# EAGLE board CT_schematic (EAGLE 7.6.0)

Size 100 x 80 mm. Coordinates in mm from the lower left corner, seen from the top.
Outline: 0,0 100,0 100,80 0,80 0,0
Copper layers (1*16): Top 0.035mm / dielectric 1.5mm / Bottom 0.035mm
Design rules "default": minimum track width 10mil, minimum drill 24mil, track to track 8mil, track to pad 8mil, pad to pad 8mil, via to via 8mil, smd to smd 8mil, copper to edge 40mil, drill to drill 8mil, minimum pad ring 10mil, minimum via ring 8mil, stop-mask expansion 4mil, vias tented up to drill 0mil, thermal gap 10mil

## Footprints (pad centres in the part's own frame; a part is rotated, then mirrored left to right if it is on the bottom)
C0603 = smd 0.8 x 0.8: 1 -0.762,0; 2 0.762,0
C0402 = smd 0.5 x 0.5: 1 -0.508,0; 2 0.508,0
C0805 = smd 1.2 x 1.3: 1 -1.016,0; 2 1.016,0
C1206 = smd 1.3 x 1.6: 1 -1.524,0; 2 1.524,0
C1210 = smd 1.2 x 2.5: 1 -1.524,0; 2 1.524,0
2220 = smd 1.85 x 5.5: 1 -2.55,0; 2 2.55,0
R0603 = smd 0.8 x 0.8: 1 -0.762,0; 2 0.762,0
EXV-9H = smd 3.505 x 1.676: 1 -2.857,0; 2 2.857,0
L0603 = smd 0.8 x 0.8: 1 -0.762,0; 2 0.762,0
WE-HCI_7030/7040/7050 = smd 2.5 x 3: 1 -2.45,0; 2 2.45,0
L1210 = smd 1.2 x 2.5: 1 -1.524,0; 2 1.524,0
PJ-037B_PACKAGE = drill 3.7 square: 1 12,0 | drill 3.2 square: 2 6,0
UFBGA176 = smd 0.3 x 0.3: A1 0,0; A2 0.65,0; A3 1.3,0; A4 1.95,0; A5 2.6,0; A6 3.25,0; A7 3.9,0; A8 4.55,0; A9 5.2,0; A10 5.85,0; A11 6.5,0; A12 7.15,0; A13 7.8,0; A14 8.45,0; A15 9.1,0; B1 0,-0.65; B2 0.65,-0.65; B3 1.3,-0.65; B4 1.95,-0.65; B5 2.6,-0.65; B6 3.25,-0.65; B7 3.9,-0.65; B8 4.55,-0.65; B9 5.2,-0.65; B10 5.85,-0.65; B11 6.5,-0.65; B12 7.15,-0.65; B13 7.8,-0.65; B14 8.45,-0.65; B15 9.1,-0.65; C1 0,-1.3; C2 0.65,-1.3; C3 1.3,-1.3; C4 1.95,-1.3; C5 2.6,-1.3; C6 3.25,-1.3; C7 3.9,-1.3; C8 4.55,-1.3; C9 5.2,-1.3; C10 5.85,-1.3; C11 6.5,-1.3; C12 7.15,-1.3; C13 7.8,-1.3; C14 8.45,-1.3; C15 9.1,-1.3; D1 0,-1.95; D2 0.65,-1.95; D3 1.3,-1.95; D4 1.95,-1.95; D5 2.6,-1.95; D6 3.25,-1.95; D7 3.9,-1.95; D8 4.55,-1.95; D9 5.2,-1.95; D10 5.85,-1.95; D11 6.5,-1.95; D12 7.15,-1.95; D13 7.8,-1.95; D14 8.45,-1.95; D15 9.1,-1.95; E1 0,-2.6; E2 0.65,-2.6; E3 1.3,-2.6; E4 1.95,-2.6; E12 7.15,-2.6; E13 7.8,-2.6; E14 8.45,-2.6; E15 9.1,-2.6; F1 0,-3.25; F2 0.65,-3.25; F3 1.3,-3.25; F4 1.95,-3.25; F6 3.25,-3.25; F7 3.9,-3.25; F8 4.55,-3.25; F9 5.2,-3.25; F10 5.85,-3.25; F12 7.15,-3.25; F13 7.8,-3.25; F14 8.45,-3.25; F15 9.1,-3.25; G1 0,-3.9; G2 0.65,-3.9; G3 1.3,-3.9; G4 1.95,-3.9; G6 3.25,-3.9; G7 3.9,-3.9; G8 4.55,-3.9; G9 5.2,-3.9; G10 5.85,-3.9; G12 7.15,-3.9; G13 7.8,-3.9; G14 8.45,-3.9; G15 9.1,-3.9; H1 0,-4.55; H2 0.65,-4.55; H3 1.3,-4.55; H4 1.95,-4.55; H6 3.25,-4.55; H7 3.9,-4.55; H8 4.55,-4.55; H9 5.2,-4.55; H10 5.85,-4.55; H12 7.15,-4.55; H13 7.8,-4.55; H14 8.45,-4.55; H15 9.1,-4.55; J1 0,-5.2; J2 0.65,-5.2; J3 1.3,-5.2; J4 1.95,-5.2; J6 3.25,-5.2; J7 3.9,-5.2; J8 4.55,-5.2; J9 5.2,-5.2; J10 5.85,-5.2; J12 7.15,-5.2; J13 7.8,-5.2; J14 8.45,-5.2; J15 9.1,-5.2; K1 0,-5.85; K2 0.65,-5.85; K3 1.3,-5.85; K4 1.95,-5.85; K6 3.25,-5.85; K7 3.9,-5.85; K8 4.55,-5.85; K9 5.2,-5.85; K10 5.85,-5.85; K12 7.15,-5.85; K13 7.8,-5.85; K14 8.45,-5.85; K15 9.1,-5.85; L1 0,-6.5; L2 0.65,-6.5; L3 1.3,-6.5; L4 1.95,-6.5; L12 7.15,-6.5; L13 7.8,-6.5; L14 8.45,-6.5; L15 9.1,-6.5; M1 0,-7.15; M2 0.65,-7.15; M3 1.3,-7.15; M4 1.95,-7.15; M5 2.6,-7.15; M6 3.25,-7.15; M7 3.9,-7.15; M8 4.55,-7.15; M9 5.2,-7.15; M10 5.85,-7.15; M11 6.5,-7.15; M12 7.15,-7.15; M13 7.8,-7.15; M14 8.45,-7.15; M15 9.1,-7.15; N1 0,-7.8; N2 0.65,-7.8; N3 1.3,-7.8; N4 1.95,-7.8; N5 2.6,-7.8; N6 3.25,-7.8; N7 3.9,-7.8; N8 4.55,-7.8; N9 5.2,-7.8; N10 5.85,-7.8; N11 6.5,-7.8; N12 7.15,-7.8; N13 7.8,-7.8; N14 8.45,-7.8; N15 9.1,-7.8; P1 0,-8.45; P2 0.65,-8.45; P3 1.3,-8.45; P4 1.95,-8.45; P5 2.6,-8.45; P6 3.25,-8.45; P7 3.9,-8.45; P8 4.55,-8.45; P9 5.2,-8.45; P10 5.85,-8.45; P11 6.5,-8.45; P12 7.15,-8.45; P13 7.8,-8.45; P14 8.45,-8.45; P15 9.1,-8.45; R1 0,-9.1; R2 0.65,-9.1; R3 1.3,-9.1; R4 1.95,-9.1; R5 2.6,-9.1; R6 3.25,-9.1; R7 3.9,-9.1; R8 4.55,-9.1; R9 5.2,-9.1; R10 5.85,-9.1; R11 6.5,-9.1; R12 7.15,-9.1; R13 7.8,-9.1; R14 8.45,-9.1; R15 9.1,-9.1
10100565 = smd 0.8 x 2.35: 1 0,0; 2 1.25,0; 3 2.55,0; 4 4.25,0; 5 5.43,0; 6 6.68,0; 7 7.93,0; 8 9.18,0; 9 11.67,0; 10 14.18,0; 11 15.43,0; 12 16.68,0; 13 17.93,0; 14 19.18,0; 15 21.68,0 | smd 1.5 x 3.1: 16 23.495,-1.375; 20 25.685,-22.875 | smd 1.55 x 3.1: 17 -1.815,-1.375; 21 -1.815,-22.875 | drill 1.1 pad 1.1: 18 21.68,-2.375; 19 0.68,-2.375
SSOP-28 = smd 1.5 x 0.4: 1 -3.625,4.225; 2 -3.625,3.575; 3 -3.625,2.925; 4 -3.625,2.275; 5 -3.625,1.625; 6 -3.625,0.975; 7 -3.625,0.325; 8 -3.625,-0.325; 9 -3.625,-0.975; 10 -3.625,-1.625; 11 -3.625,-2.275; 12 -3.625,-2.925; 13 -3.625,-3.575; 14 -3.625,-4.225; 15 3.625,-4.225; 16 3.625,-3.575; 17 3.625,-2.925; 18 3.625,-2.275; 19 3.625,-1.625; 20 3.625,-0.975; 21 3.625,-0.325; 22 3.625,0.325; 23 3.625,0.975; 24 3.625,1.625; 25 3.625,2.275; 26 3.625,2.925; 27 3.625,3.575; 28 3.625,4.225
FCI_10118193-0001LF = smd 0.4 x 1.35: 1 -1.3,2.675; 2 -0.65,2.675; 3 0,2.675; 4 0.65,2.675; 5 1.3,2.675 | smd 1.6 x 1.4: 6 -3.2,2.45; 7 3.2,2.45 | smd 1.9 x 1.9: 8 -1.2,0; 9 1.2,0 | hole 0.5: -3.3,0; 3.3,0
TST-110-05-T-D-RA = drill 1 pad 1.7 square: 1 0,0 | drill 1 pad 1.7: 2 0,2.54; 3 2.54,0; 4 2.54,2.54; 5 5.08,0; 6 5.08,2.54; 7 7.62,0; 8 7.62,2.54; 9 10.16,0; 10 10.16,2.54; 11 12.7,0; 12 12.7,2.54; 13 15.24,0; 14 15.24,2.54; 15 17.78,0; 16 17.78,2.54; 17 20.32,0; 18 20.32,2.54; 19 22.86,0; 20 22.86,2.54
LH430WV2-SD01 = smd 0.23 x 0.7: 1 0,0; 2 -0.4,0; 3 -0.8,0; 4 -1.2,0; 5 -1.6,0; 6 -2,0; 7 -2.4,0; 8 -2.8,0; 9 -3.2,0; 10 -3.6,0; 11 -4,0; 12 -4.4,0; 13 -4.8,0; 14 -5.2,0; 15 -5.6,0; 16 -5.6,-2.15; 17 -5.2,-2.15; 18 -4.8,-2.15; 19 -4.4,-2.15; 20 -4,-2.15; 21 -3.6,-2.15; 22 -3.2,-2.15; 23 -2.8,-2.15; 24 -2.4,-2.15; 25 -2,-2.15; 26 -1.6,-2.15; 27 -1.2,-2.15; 28 -0.8,-2.15; 29 -0.4,-2.15; 30 0,-2.15
WFDN-8 = smd 0.48 x 0.7: 1 0,0; 2 1.27,0; 3 2.54,0; 4 3.81,0; 5 3.81,4.45; 6 2.54,4.45; 7 1.27,4.45; 8 0,4.45 | smd 4 x 3: 9 1.89,2.25
ABS07-32.768KHZ-7-T = smd 1.1 x 2.4: 1 -2.5,0; 2 0,0
ABLS-25.000MHZ-B2F-T = smd 5.6 x 2.8: 1 -3.81,0; 2 5.69,0
ABLS-12.000MHZ-B4-T = smd 5.6 x 2.8: 1 0,0; 2 9.5,0
WSON-8 = smd 0.3 x 0.6: 1 -0.75,0; 2 0.05,0; 3 0.85,0; 4 1.65,0; 5 1.65,3.8; 6 0.85,3.8; 7 0.05,3.8; 8 -0.75,3.8 | smd 3 x 2.6: PAD 0.45,1.9
SOIC-8_EP = smd 1.6 x 0.533: 1 -2.921,1.905; 2 -2.921,0.635; 3 -2.921,-0.635; 4 -2.921,-1.905; 5 2.921,-1.905; 6 2.921,-0.635; 7 2.921,0.635; 8 2.921,1.905 | smd 2.54 x 3.302: EPAD 0,0 | drill 0.406 pad 0.406: P$1 -0.508,0.635; P$2 0.381,0.635; P$3 -0.508,-0.635; P$4 0.381,-0.635
QFN-16_EP = smd 0.805 x 0.3: 1 -1.452,0.75; 2 -1.452,0.25; 3 -1.452,-0.25; 4 -1.452,-0.75; 9 1.452,-0.75; 10 1.452,-0.25; 11 1.452,0.25; 12 1.452,0.75 | smd 0.3 x 0.805: 5 -0.75,-1.452; 6 -0.25,-1.452; 7 0.25,-1.452; 8 0.75,-1.452; 13 0.75,1.452; 14 0.25,1.452; 15 -0.25,1.452; 16 -0.75,1.452 | smd 1.55 x 1.55: 17 0,0
DFN-8_DDB = smd 0.805 x 0.3: 1 -0.952,0.75; 2 -0.952,0.25; 3 -0.952,-0.25; 4 -0.952,-0.75; 5 0.952,-0.75; 6 0.952,-0.25; 7 0.952,0.25; 8 0.952,0.75 | smd 0.61 x 2.2: 9 0,0
QFN-38_UHF = smd 0.75 x 0.3: 1 -2.4,2.75; 2 -2.4,2.25; 3 -2.4,1.75; 4 -2.4,1.25; 6 -2.4,0.25; 7 -2.4,-0.25; 8 -2.4,-0.75; 9 -2.4,-1.25; 10 -2.4,-1.75; 11 -2.4,-2.25; 12 -2.4,-2.75; 20 2.4,-2.75; 21 2.4,-2.25; 22 2.4,-1.75; 23 2.4,-1.25; 24 2.4,-0.75; 25 2.4,-0.25; 26 2.4,0.25; 27 2.4,0.75; 28 2.4,1.25; 29 2.4,1.75; 30 2.4,2.25; 31 2.4,2.75 | smd 0.758 x 0.3: 5 -2.4,0.75 | smd 0.3 x 0.75: 13 -1.5,-3.4; 14 -1,-3.4; 15 -0.5,-3.4; 16 0,-3.4; 17 0.5,-3.4; 18 1,-3.4; 19 1.5,-3.4; 32 1.5,3.4; 33 1,3.4; 34 0.5,3.4; 35 0,3.4; 36 -0.5,3.4; 37 -1,3.4; 38 -1.5,3.4 | smd 3.2 x 5.2: 39 0,0
IRF8306MTRPBF = smd 0.9 x 1.85: 1 0,0; 2 0,-2.35; 6 6.4,0; 7 6.4,-2.35 | smd 0.75 x 0.75: 3 1.75,-1.175 | smd 1.45 x 0.87: 4 3.5,-0.565; 5 3.5,-1.785
SW_4-1437565-2 = smd 1.4 x 2.1: 1 -2.23,4.55; 2 -2.23,-4.55; 3 2.23,4.55; 4 2.23,-4.55
LGM67K-G1J2-24-Z = smd 0.8 x 1.4: A -2,0; C 0,0
NC7SZ125M5X = smd 1.3 x 0.7: 1 -1.3,0.95; 2 -1.3,0; 3 -1.3,-0.95; 4 1.3,-0.95; 5 1.3,0.95

## Placement (x,y rotation side)
C1  1e-06  [C0603]  -34.29,91.44 0 top  (outside the outline)
C2  1e-07  [C0603]  -38.1,91.44 0 top  (outside the outline)
C3  1e-07  [C0603]  -41.91,91.44 0 top  (outside the outline)
C4  1e-07  [C0603]  -45.72,91.44 0 top  (outside the outline)
C5  1e-07  [C0603]  -49.53,91.44 0 top  (outside the outline)
C6  1e-07  [C0603]  -53.34,91.44 0 top  (outside the outline)
C7  1e-07  [C0603]  -57.15,91.44 0 top  (outside the outline)
C8  1e-07  [C0603]  -60.96,91.44 0 top  (outside the outline)
C9  1e-07  [C0603]  -64.77,91.44 0 top  (outside the outline)
C10  1e-07  [C0603]  -68.58,91.44 0 top  (outside the outline)
C11  1e-07  [C0603]  -72.39,91.44 0 top  (outside the outline)
C12  1e-07  [C0603]  -76.2,91.44 0 top  (outside the outline)
C13  1e-07  [C0603]  -80.01,91.44 0 top  (outside the outline)
C14  1e-07  [C0603]  -83.82,91.44 0 top  (outside the outline)
C15  1e-07  [C0603]  -87.63,91.44 0 top  (outside the outline)
C16  1e-07  [C0603]  -91.44,91.44 0 top  (outside the outline)
C17  4.7e-06  [C0603]  -15.24,91.44 0 top  (outside the outline)
C18  1e-08  [C0603]  -15.24,96.52 0 top  (outside the outline)
C19  1e-06  [C0603]  -19.05,96.52 0 top  (outside the outline)
C20  1e-07  [C0603]  -22.86,96.52 0 top  (outside the outline)
C21  2.2e-06  [C0603]  -19.05,91.44 0 top  (outside the outline)
C22  1e-07  [C0603]  -26.67,96.52 0 top  (outside the outline)
C23  1e-07  [C0603]  -30.48,96.52 0 top  (outside the outline)
C24  1e-11  [C0402]  -21.59,101.6 0 top  (outside the outline)
C25  1e-11  [C0402]  -25.4,101.6 0 top  (outside the outline)
C26  1e-11  [C0402]  -29.21,101.6 0 top  (outside the outline)
C27  1e-11  [C0402]  -33.02,101.6 0 top  (outside the outline)
C28  1e-07  [C0402]  -36.83,101.6 0 top  (outside the outline)
C29  1e-05  [C0805]  -72.39,69.85 0 top  (outside the outline)
C30  1e-07  [C0402]  -40.64,101.6 0 top  (outside the outline)
C31  4.7e-06  [C0805]  -77.47,69.85 0 top  (outside the outline)
C32  1e-07  [C0402]  -44.45,101.6 0 top  (outside the outline)
C33  1e-07  [C0402]  -48.26,101.6 0 top  (outside the outline)
C34  1e-07  [C0402]  -52.07,101.6 0 top  (outside the outline)
C35  1e-07  [C0402]  -55.88,101.6 0 top  (outside the outline)
C36  1e-07  [C0402]  -59.69,101.6 0 top  (outside the outline)
C37  1e-07  [C0402]  -63.5,101.6 0 top  (outside the outline)
C38  1e-07  [C0402]  -67.31,101.6 0 top  (outside the outline)
C39  1e-07  [C0402]  -71.12,101.6 0 top  (outside the outline)
C40  1e-07  [C0402]  -74.93,101.6 0 top  (outside the outline)
C41  1e-07  [C0402]  -78.74,101.6 0 top  (outside the outline)
C42  1e-08  [C0402]  -82.55,101.6 0 top  (outside the outline)
C43  1e-05  [C1206]  -41.91,69.85 0 top  (outside the outline)
C44  1e-05  [C0805]  -82.55,69.85 0 top  (outside the outline)
C45  1e-05  [C1210]  -77.47,63.5 0 top  (outside the outline)
C46  1e-05  [C1210]  -83.82,63.5 0 top  (outside the outline)
C47  1e-05  [C1210]  -90.17,63.5 0 top  (outside the outline)
C48  1e-05  [C1210]  -16.51,69.85 0 top  (outside the outline)
C49  1e-08  [C0402]  -86.36,101.6 0 top  (outside the outline)
C50  1e-05  [C1206]  -48.26,69.85 0 top  (outside the outline)
C51  1e-05  [C1210]  -22.86,69.85 0 top  (outside the outline)
C52  1e-05  [C0805]  -87.63,69.85 0 top  (outside the outline)
C53  1e-06  [C0603]  -34.29,96.52 0 top  (outside the outline)
C54  1e-07  [C0402]  -90.17,101.6 0 top  (outside the outline)
C55  6.8e-05  [2220]  -16.51,46.99 0 top  (outside the outline)
C56  1e-05  [C1210]  -29.21,69.85 0 top  (outside the outline)
C57  2.2e-06  [C0603]  -22.86,91.44 0 top  (outside the outline)
C58  2.2e-07  [C0603]  -26.67,91.44 0 top  (outside the outline)
C59  1e-07  [C0402]  -93.98,101.6 0 top  (outside the outline)
C60  2.2e-06  [C0603]  -30.48,91.44 0 top  (outside the outline)
C61  2.45e-08  [R0603]  -45.72,81.28 0 top  (outside the outline)
C62  2.8258362168397e-09  [R0603]  -20.32,76.2 0 top  (outside the outline)
C63  7.105e-09  [R0603]  -30.48,76.2 0 top  (outside the outline)
C64  0.0001  [EXV-9H]  -54.61,55.88 0 top  (outside the outline)
C65  0.0001  [EXV-9H]  -66.04,55.88 0 top  (outside the outline)
C66  1e-08  [C0402]  -15.24,106.68 0 top  (outside the outline)
C67  1e-08  [C0402]  -19.05,106.68 0 top  (outside the outline)
C68  1e-08  [C0402]  -22.86,106.68 0 top  (outside the outline)
F1  240.0  [L0603]  -38.1,96.52 0 top  (outside the outline)
I1  3.3e-06  [WE-HCI_7030/7040/7050]  -77.47,6.35 0 top  (outside the outline)
I2  1e-05  [L1210]  -35.56,69.85 0 top  (outside the outline)
J1  PJ-037B  [PJ-037B_PACKAGE]  -72.39,7.62 0 top  (outside the outline)
R2  1000.0  [R0603]  -41.91,96.52 0 top  (outside the outline)
R7  4700.0  [R0603]  -45.72,96.52 0 top  (outside the outline)
R8  4700.0  [R0603]  -49.53,96.52 0 top  (outside the outline)
R9  2200.0  [R0603]  -53.34,96.52 0 top  (outside the outline)
R10  10000.0  [R0603]  -50.8,81.28 0 top  (outside the outline)
R11  10000.0  [R0603]  -55.88,81.28 0 top  (outside the outline)
R12  10000.0  [R0603]  -60.96,81.28 0 top  (outside the outline)
R13  10000.0  [R0603]  -66.04,81.28 0 top  (outside the outline)
R14  100000.0  [R0603]  -35.56,76.2 0 top  (outside the outline)
R15  100000.0  [R0603]  -40.64,76.2 0 top  (outside the outline)
R16  100000.0  [R0603]  -45.72,76.2 0 top  (outside the outline)
R17  100000.0  [R0603]  -50.8,76.2 0 top  (outside the outline)
R18  100000.0  [R0603]  -55.88,76.2 0 top  (outside the outline)
R19  100000.0  [R0603]  -60.96,76.2 0 top  (outside the outline)
R20  100000.0  [R0603]  -66.04,76.2 0 top  (outside the outline)
R21  100000.0  [R0603]  -71.12,76.2 0 top  (outside the outline)
R22  100000.0  [R0603]  -76.2,76.2 0 top  (outside the outline)
R23  100000.0  [R0603]  -81.28,76.2 0 top  (outside the outline)
R24  100000.0  [R0603]  -86.36,76.2 0 top  (outside the outline)
R25  4700.0  [R0603]  -57.15,96.52 0 top  (outside the outline)
R26  10000.0  [R0603]  -71.12,81.28 0 top  (outside the outline)
R27  10000.0  [R0603]  -76.2,81.28 0 top  (outside the outline)
R28  10000.0  [R0603]  -81.28,81.28 0 top  (outside the outline)
R29  10000.0  [R0603]  -86.36,81.28 0 top  (outside the outline)
R30  10000.0  [R0603]  -91.44,81.28 0 top  (outside the outline)
R31  10000.0  [R0603]  -15.24,86.36 0 top  (outside the outline)
R32  10000.0  [R0603]  -20.32,86.36 0 top  (outside the outline)
R33  10000.0  [R0603]  -25.4,86.36 0 top  (outside the outline)
R34  10000.0  [R0603]  -30.48,86.36 0 top  (outside the outline)
R35  100000.0  [R0603]  -91.44,76.2 0 top  (outside the outline)
R36  100000.0  [R0603]  -15.24,81.28 0 top  (outside the outline)
R37  100000.0  [R0603]  -20.32,81.28 0 top  (outside the outline)
R38  100000.0  [R0603]  -25.4,81.28 0 top  (outside the outline)
R39  200.0  [R0603]  -60.96,96.52 0 top  (outside the outline)
R40  1000.0  [R0603]  -64.77,96.52 0 top  (outside the outline)
R41  910.0  [R0603]  -68.58,96.52 0 top  (outside the outline)
R42  2200.0  [R0603]  -72.39,96.52 0 top  (outside the outline)
R43  100000.0  [R0603]  -30.48,81.28 0 top  (outside the outline)
R44  1800.0  [R0603]  -76.2,96.52 0 top  (outside the outline)
R45  1000.0  [R0603]  -80.01,96.52 0 top  (outside the outline)
R46  20000.0  [R0603]  -35.56,86.36 0 top  (outside the outline)
R47  91000.0  [R0603]  -40.64,86.36 0 top  (outside the outline)
R48  300000.0  [R0603]  -35.56,81.28 0 top  (outside the outline)
R49  100000.0  [R0603]  -40.64,81.28 0 top  (outside the outline)
R50  1600000.0  [R0603]  -25.4,76.2 0 top  (outside the outline)
R51  10000.0  [R0603]  -45.72,86.36 0 top  (outside the outline)
R52  75000.0  [R0603]  -50.8,86.36 0 top  (outside the outline)
R53  10000.0  [R0603]  -55.88,86.36 0 top  (outside the outline)
R54  10000.0  [R0603]  -60.96,86.36 0 top  (outside the outline)
R55  95300.0  [R0603]  -66.04,86.36 0 top  (outside the outline)
R56  95300.0  [R0603]  -71.12,86.36 0 top  (outside the outline)
R57  10000.0  [R0603]  -76.2,86.36 0 top  (outside the outline)
R58  10000.0  [R0603]  -81.28,86.36 0 top  (outside the outline)
R59  10000.0  [R0603]  -86.36,86.36 0 top  (outside the outline)
R60  47000.0  [R0603]  -91.44,86.36 0 top  (outside the outline)
U1  STM32F469IEH6  [UFBGA176]  -41.91,39.37 0 top  (outside the outline)
U2  10100565  [10100565]  -40.64,25.4 0 top  (outside the outline)
U3  FT232RL-REEL  [SSOP-28]  -52.07,7.62 0 top  (outside the outline)
U4  10118193-0001LF  [FCI_10118193-0001LF]  -66.04,45.72 0 top  (outside the outline)
U5  TST-110-05-T-D-RA  [TST-110-05-T-D-RA]  -46.99,53.34 0 top  (outside the outline)
U6  LH430WV2-SD01  [LH430WV2-SD01]  -83.82,97.79 0 top  (outside the outline)
U7  SST26VF016B-104I/MF  [WFDN-8]  -62.23,33.02 0 top  (outside the outline)
U8  ABS07-32.768KHZ-7-T  [ABS07-32.768KHZ-7-T]  -48.26,63.5 0 top  (outside the outline)
U9  ABLS-25.000MHZ-B2F-T  [ABLS-25.000MHZ-B2F-T]  -85.09,55.88 0 top  (outside the outline)
U10  ABLS-12.000MHZ-B4-T  [ABLS-12.000MHZ-B4-T]  -29.21,63.5 0 top  (outside the outline)
U11  LP3878SDX-ADJ/NOPB  [WSON-8]  -38.1,44.45 0 top  (outside the outline)
U12  MIC5234YME  [SOIC-8_EP]  -57.15,62.23 0 top  (outside the outline)
U13  LP3878SDX-ADJ/NOPB  [WSON-8]  -58.42,44.45 0 top  (outside the outline)
U14  LTC3601EUD#PBF  [QFN-16_EP]  -15.24,101.6 0 top  (outside the outline)
U15  LT3494AEDDB#TRMPBF  [DFN-8_DDB]  -26.67,105.41 0 top  (outside the outline)
U16  LTC2928CUHF#PBF  [QFN-38_UHF]  -74.93,45.72 0 top  (outside the outline)
U17  IRF8306MTRPbF  [IRF8306MTRPBF]  -77.47,35.56 0 top  (outside the outline)
U18  IRF8306MTRPbF  [IRF8306MTRPBF]  -92.71,35.56 0 top  (outside the outline)
U19  4-1437565-2  [SW_4-1437565-2]  -27.94,35.56 0 top  (outside the outline)
U20  Q65110A2395  [LGM67K-G1J2-24-Z]  -66.04,63.5 0 top  (outside the outline)
U21  nc7sz125m5x  [NC7SZ125M5X]  -53.34,69.85 0 top  (outside the outline)
U22  nc7sz125m5x  [NC7SZ125M5X]  -59.69,69.85 0 top  (outside the outline)
U23  nc7sz125m5x  [NC7SZ125M5X]  -66.04,69.85 0 top  (outside the outline)

## Library data of the parts
C1-C68 F1 I1 I2 J1 R2 R7-R60 U1-U23 = circuit_tree

## Nets
CLK_CRYSTAL_U1_E1: C24.1 U1.E1 U8.1
CLK_CRYSTAL_U1_F1: C25.1 U1.F1 U8.2
CLK_CRYSTAL_U1_G1: C26.1 U1.G1 U9.1
CLK_CRYSTAL_U1_H1: C27.1 U1.H1 U9.2
CLK_CRYSTAL_U3_27: U3.27 U10.1
CLK_CRYSTAL_U3_28: U3.28 U10.2
GND: C1.2 C2.2 C3.2 C4.2 C5.2 C6.2 C7.2 C8.2 C9.2 C10.2 C11.2 C12.2 C13.2 C14.2 C15.2 C16.2 C17.2 C18.2 C19.2 C20.2 C21.2 C22.2 C23.2 C24.2 C25.2 C26.2 C27.2 C28.2 C29.2 C30.2 C31.2 C32.2 C33.2 C34.2 C35.2 C36.2 C37.2 C38.2 C39.2 C40.2 C41.2 C42.2 C43.2 C44.2 C45.2 C46.2 C47.2 C48.2 C49.2 C50.2 C51.2 C52.2 C53.2 C55.1 C55.2 C56.2 C57.2 C58.2 C59.2 C60.2 C61.2 C62.2 C63.2 C64.2 C65.2 C66.2 C67.2 C68.2 J1.2 R2.2 R27.2 R33.2 R34.2 R40.2 R42.2 R45.2 R46.2 R48.2 R52.2 R55.2 R56.2 R57.2 R58.2 R59.2 U1.D5 U1.D7 U1.D8 U1.D9 U1.F2 U1.F6 U1.F7 U1.F8 U1.F9 U1.F10 U1.F12 U1.G2 U1.G6 U1.G7 U1.G8 U1.G9 U1.G10 U1.G12 U1.H6 U1.H7 U1.H8 U1.H9 U1.H10 U1.H12 U1.J6 U1.J7 U1.J8 U1.J9 U1.J10 U1.K6 U1.K7 U1.K8 U1.K9 U1.K10 U1.M1 U1.M8 U1.M9 U1.N1 U2.6 U2.10 U2.12 U2.16 U2.17 U2.20 U2.21 U3.7 U3.18 U3.21 U3.25 U3.26 U4.5 U4.6 U4.7 U4.8 U4.9 U5.4 U5.6 U5.8 U5.10 U5.12 U5.14 U5.16 U5.18 U5.20 U6.1 U6.6 U6.9 U6.12 U6.15 U6.17 U6.18 U6.19 U6.24 U6.27 U7.4 U7.9 U11.3 U11.PAD U12.7 U12.EPAD U13.3 U13.PAD U14.1 U14.9 U14.17 U15.2 U15.9 U16.8 U16.9 U16.10 U16.12 U16.13 U16.24 U16.25 U16.30 U16.32 U16.39 U20.C U21.2 U21.3 U22.1 U22.3 U23.1 U23.3
NET_U1_C6: R10.1 U1.C6
NET_U1_D6: R11.1 U1.D6
NET_U1_D13: C21.1 U1.D13 U1.K12
NET_U1_F13: C23.1 U1.F13
NET_U1_J1: R8.1 U1.J1 U23.4
NET_U1_L4: R13.1 U1.L4
NET_U1_M6: R12.1 U1.M6
NET_U1_R1: C18.1 C19.1 F1.1 U1.P1 U1.R1
NET_U1_R14: U20.A
NET_U1_R15: U19.3 U19.4
NET_U2_1: R16.1 U2.1
NET_U2_2: R15.1 U2.2
NET_U2_18: U2.18 U2.19
NET_U3_14: R26.1 U3.14
NET_U3_17: C32.1 U3.17
NET_U3_19: R27.1 U3.19
NET_U4_1: R25.1 U4.1
NET_U4_2: U3.16 U4.2
NET_U4_3: U3.15 U4.3
NET_U4_19: R25.2
NET_U5_19: R33.1 U5.19
NET_U6_4: R7.1 U6.4 U22.4
NET_U6_5: R9.1
NET_U6_20: R34.1 U6.20
NET_U11_1: C42.1 U11.1
NET_U11_6: R39.2 R40.1 U11.6
NET_U11_8: R38.1 U11.8
NET_U12_4: R41.2 R42.1 U12.4
NET_U13_1: C49.1 U13.1
NET_U13_6: R44.2 R45.1 U13.6
NET_U13_8: R43.1 U13.8
NET_U14_3: C54.2 I1.1 U14.3 U14.4
NET_U14_6: C54.1 U14.6
NET_U14_7: C53.1 U14.7 U14.12
NET_U14_10: R48.1 U14.10
NET_U14_11: R46.1 R47.1 U14.11
NET_U14_14: U14.14
NET_U14_ATNET_3: I1.2 R47.2
NET_U15_1: I2.1 U15.1
NET_U15_5: R49.1 U15.5
NET_U15_6: R50.1 U15.6
NET_U15_8: C58.1 U15.8
NET_U16_3: R58.1 U16.3
NET_U16_6: R55.1 U16.6
NET_U16_7: R56.1 U16.7
NET_U16_16: R57.1 R60.1 U16.16
NET_U16_18: R54.1 U16.18
NET_U16_19: R53.1 U16.19 U16.20
NET_U16_21: R51.1 R52.1 U16.21 U21.4 U22.2 U23.2
NET_U16_26: C62.1 U16.26
NET_U16_27: C61.1 U16.27
NET_U16_28: C63.1 U16.28
NET_U16_38: R59.1 U16.38
NET_U17_3: U16.2 U17.3
NET_U18_3: U16.37 U18.3
NET_U19_1: R2.1 U19.1 U19.2
PROC_DSIHOST_CKN: U1.L13 U6.13
PROC_DSIHOST_CKP: U1.L12 U6.14
PROC_DSIHOST_D0N: U1.M13 U6.7
PROC_DSIHOST_D0P: U1.M12 U6.8
PROC_DSIHOST_D1N: U1.E13 U6.10
PROC_DSIHOST_D1P: U1.E12 U6.11
PROC_QUADSPI_BK1_IO0: U1.L3 U7.5
PROC_QUADSPI_BK1_IO1: U1.L2 U7.2
PROC_QUADSPI_BK1_IO2: R36.1 U1.A2 U7.3
PROC_QUADSPI_BK1_IO3: R37.1 U1.M15 U7.7
PROC_QUADSPI_BK1_NCS: R35.1 U1.B6 U7.1
PROC_QUADSPI_CLK: U1.L1 U7.6
PROC_SDIO_CK: R14.1 U1.A12 U2.8
PROC_SDIO_D0: R17.1 U1.G14 U2.4
PROC_SDIO_D1: R18.1 U1.F14 U2.3
PROC_SDIO_D2: R19.1 U1.B14 U2.15
PROC_SDIO_D3: R20.1 U1.B13 U2.14
PROC_SDIO_D4: R21.1 U1.A5 U2.13
PROC_SDIO_D5: R22.1 U1.B4 U2.11
PROC_SDIO_D6: R23.1 U1.H15 U2.7
PROC_SDIO_D7: R24.1 U1.G15 U2.5
PROC_SYS_JTCK_SWCLK: R31.1 U1.A14 U5.9
PROC_SYS_JTDI: R29.1 U1.A13 U5.5
PROC_SYS_JTDO_SWO: U1.A10 U5.13
PROC_SYS_JTMS_SWDIO: R30.1 U1.A15 U5.7
PROC_SYS_JTRST: R28.1 U1.A9 U5.3
PROC_UART7_RX: U1.K2 U3.1
PROC_UART7_TX: U1.K1 U3.5
RST_OUT_U5_SRESET_B: R32.1 U5.15 U21.1
VCC_6V2: C59.1 C60.1 C64.1 C65.1 J1.1 R51.2 R53.2 R54.2 R60.2 U16.11 U16.22 U17.1 U17.2 U17.6 U17.7 U18.1 U18.2 U18.6 U18.7
VCC_S1_6V2: C43.1 C45.1 C46.1 C50.1 C52.1 C56.1 I2.2 R38.2 R43.2 R49.2 U11.4 U12.5 U12.8 U13.4 U14.15 U14.16 U15.3 U15.4 U17.4 U17.5
VCC_S2_6V2: U18.4 U18.5
VCC_TIER1_1V2: C22.1 C44.1 R39.1 U1.M10 U11.5
VCC_TIER1_1V5: C47.1 C48.1 R41.1 U6.29 U12.1
VCC_TIER1_2V8: C38.1 C39.1 C40.1 C51.1 R44.1 U6.16 U6.21 U6.22 U6.23 U13.5
VCC_TIER1_3V3: C1.1 C2.1 C3.1 C4.1 C5.1 C6.1 C7.1 C8.1 C9.1 C10.1 C11.1 C12.1 C13.1 C14.1 C15.1 C16.1 C17.1 C20.1 C28.1 C29.1 C30.1 C31.1 C33.1 C34.1 C35.1 C36.1 C41.1 C55.2 C66.1 C67.1 C68.1 F1.2 I1.2 R7.2 R8.2 R9.2 R10.2 R11.2 R12.2 R13.2 R14.2 R15.2 R16.2 R17.2 R18.2 R19.2 R20.2 R21.2 R22.2 R23.2 R24.2 R26.2 R28.2 R29.2 R30.2 R31.2 R32.2 R35.2 R36.2 R37.2 R47.2 U1.C1 U1.C5 U1.C7 U1.C8 U1.C9 U1.F3 U1.G3 U1.G13 U1.H13 U1.J12 U1.J13 U1.K4 U1.N8 U1.N9 U1.N10 U2.9 U3.4 U3.20 U5.1 U5.2 U6.2 U7.8 U14.8 U21.5 U22.5 U23.5
VCC_TIER1_12V0: C37.1 C57.1 R50.2 U6.30 U15.7

## Tracks (layer width: path | path; a pad name or v marks a point on that pad's centre or on a via)
CLK_CRYSTAL_U1_E1  (2 unrouted)
CLK_CRYSTAL_U1_F1  (2 unrouted)
CLK_CRYSTAL_U1_G1  (2 unrouted)
CLK_CRYSTAL_U1_H1  (2 unrouted)
CLK_CRYSTAL_U3_27  (1 unrouted)
CLK_CRYSTAL_U3_28  (1 unrouted)
GND  (187 unrouted)
NET_U1_C6  (1 unrouted)
NET_U1_D6  (1 unrouted)
NET_U1_D13  (2 unrouted)
NET_U1_F13  (1 unrouted)
NET_U1_J1  (2 unrouted)
NET_U1_L4  (1 unrouted)
NET_U1_M6  (1 unrouted)
NET_U1_R1  (4 unrouted)
NET_U1_R15  (1 unrouted)
NET_U2_1  (1 unrouted)
NET_U2_2  (1 unrouted)
NET_U2_18  (1 unrouted)
NET_U3_14  (1 unrouted)
NET_U3_17  (1 unrouted)
NET_U3_19  (1 unrouted)
NET_U4_1  (1 unrouted)
NET_U4_2  (1 unrouted)
NET_U4_3  (1 unrouted)
NET_U5_19  (1 unrouted)
NET_U6_4  (2 unrouted)
NET_U6_20  (1 unrouted)
NET_U11_1  (1 unrouted)
NET_U11_6  (2 unrouted)
NET_U11_8  (1 unrouted)
NET_U12_4  (2 unrouted)
NET_U13_1  (1 unrouted)
NET_U13_6  (2 unrouted)
NET_U13_8  (1 unrouted)
NET_U14_3  (3 unrouted)
NET_U14_6  (1 unrouted)
NET_U14_7  (2 unrouted)
NET_U14_10  (1 unrouted)
NET_U14_11  (2 unrouted)
NET_U14_ATNET_3  (1 unrouted)
NET_U15_1  (1 unrouted)
NET_U15_5  (1 unrouted)
NET_U15_6  (1 unrouted)
NET_U15_8  (1 unrouted)
NET_U16_3  (1 unrouted)
NET_U16_6  (1 unrouted)
NET_U16_7  (1 unrouted)
NET_U16_16  (2 unrouted)
NET_U16_18  (1 unrouted)
NET_U16_19  (2 unrouted)
NET_U16_21  (5 unrouted)
NET_U16_26  (1 unrouted)
NET_U16_27  (1 unrouted)
NET_U16_28  (1 unrouted)
NET_U16_38  (1 unrouted)
NET_U17_3  (1 unrouted)
NET_U18_3  (1 unrouted)
NET_U19_1  (2 unrouted)
PROC_DSIHOST_CKN  (1 unrouted)
PROC_DSIHOST_CKP  (1 unrouted)
PROC_DSIHOST_D0N  (1 unrouted)
PROC_DSIHOST_D0P  (1 unrouted)
PROC_DSIHOST_D1N  (1 unrouted)
PROC_DSIHOST_D1P  (1 unrouted)
PROC_QUADSPI_BK1_IO0  (1 unrouted)
PROC_QUADSPI_BK1_IO1  (1 unrouted)
PROC_QUADSPI_BK1_IO2  (2 unrouted)
PROC_QUADSPI_BK1_IO3  (2 unrouted)
PROC_QUADSPI_BK1_NCS  (2 unrouted)
PROC_QUADSPI_CLK  (1 unrouted)
PROC_SDIO_CK  (2 unrouted)
PROC_SDIO_D0  (2 unrouted)
PROC_SDIO_D1  (2 unrouted)
PROC_SDIO_D2  (2 unrouted)
PROC_SDIO_D3  (2 unrouted)
PROC_SDIO_D4  (2 unrouted)
PROC_SDIO_D5  (2 unrouted)
PROC_SDIO_D6  (2 unrouted)
PROC_SDIO_D7  (2 unrouted)
PROC_SYS_JTCK_SWCLK  (2 unrouted)
PROC_SYS_JTDI  (2 unrouted)
PROC_SYS_JTDO_SWO  (1 unrouted)
PROC_SYS_JTMS_SWDIO  (2 unrouted)
PROC_SYS_JTRST  (2 unrouted)
PROC_UART7_RX  (1 unrouted)
PROC_UART7_TX  (1 unrouted)
RST_OUT_U5_SRESET_B  (2 unrouted)
VCC_6V2  (18 unrouted)
VCC_S1_6V2  (19 unrouted)
VCC_S2_6V2  (1 unrouted)
VCC_TIER1_1V2  (4 unrouted)
VCC_TIER1_1V5  (4 unrouted)
VCC_TIER1_2V8  (9 unrouted)
VCC_TIER1_3V3  (86 unrouted)
VCC_TIER1_12V0  (4 unrouted)